# Altium PCB Awtrix Finally.pcbdoc (part 3 of 4)
Units mil, origin at the board's own origin, x right, y up, seen from the top; angles counter-clockwise.
Board outline 8820 x 2812 mil, 2 copper layers (Top Layer, Bottom Layer); 513 components, 259 nets, 1543 pads, 743 vias.
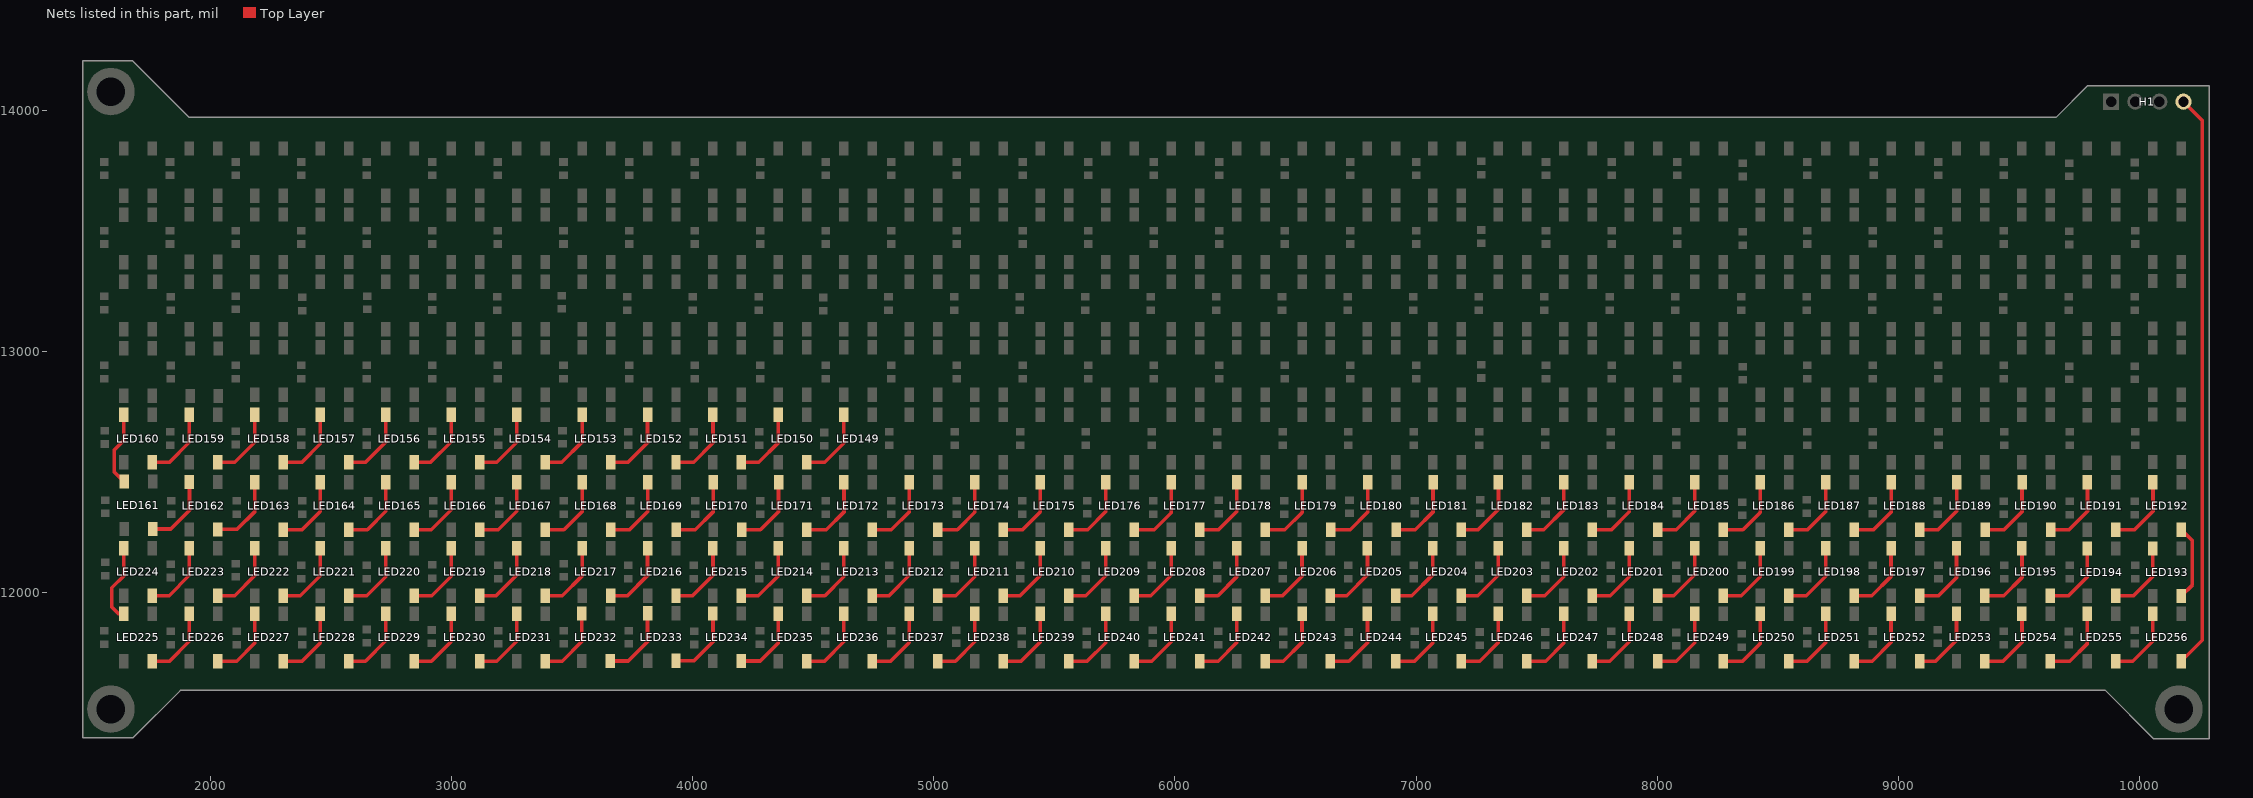
[diagram p3: the nets of this part, all layers, seen from the top]

## Via types
v1: diameter 20, hole 15, Top Layer to Bottom Layer, 743 vias

## Nets (pads, with @x,y where several pads share a name; then routed paths per layer and width w, separated by ;. In a path a pad name is that pad's centre, name@x,y a point inside that pad or via, vN(x,y) a via of type N, cw(c..) or ccw(c..) an arc to the next point about the centre after c; other vN are vias at no path point) (continued)
LED149_2: LED149.2 LED150.4 | length 303.8
  Top Layer w15: LED150.4@4473.57,12541.68 4547.68,12541.68 4626.92,12620.92 LED149.2@4626.92,12738.53
LED150_2: LED150.2 LED151.4 | length 302.3
  Top Layer w15: LED151.4@4202.12,12541.68 4273.68,12541.68 4355.47,12623.47 LED150.2@4355.47,12738.53
LED151_2: LED151.2 LED152.4 | length 303.1
  Top Layer w15: LED152.4@3930.67,12541.68 4003.68,12541.68 4084.02,12622.02 LED151.2@4084.02,12738.53
LED152_2: LED152.2 LED153.4 | length 302.8
  Top Layer w15: LED153.4@3659.22,12541.68 3731.68,12541.68 3812.57,12622.57 LED152.2@3812.57,12738.53
LED153_2: LED153.2 LED154.4 | length 301.1
  Top Layer w15: LED154.4@3387.76,12541.68 3457.27,12541.68 3541.12,12625.52 LED153.2@3541.12,12738.53
LED154_2: LED154.2 LED155.4 | length 301.6
  Top Layer w15: LED155.4@3116.31,12541.68 3186.68,12541.68 3269.66,12624.66 LED154.2@3269.66,12738.53
LED155_2: LED155.2 LED156.4 | length 300.1
  Top Layer w15: LED156.4@2844.86,12541.68 2912.68,12541.68 2998.21,12627.21 LED155.2@2998.21,12738.53
LED156_2: LED156.2 LED157.4 | length 301.3
  Top Layer w15: LED157.4@2573.41,12541.68 2643.24,12541.68 2726.76,12625.21 LED156.2@2726.76,12738.53
LED157_2: LED157.2 LED158.4 | length 305.6
  Top Layer w15: LED158.4@2301.96,12541.68 2379.24,12541.68 2455.31,12617.75 LED157.2@2455.31,12738.53
LED158_2: LED158.2 LED159.4 | length 301.6
  Top Layer w15: LED159.4@2030.51,12541.68 2100.83,12541.68 2183.86,12624.71 LED158.2@2183.86,12738.53
LED159_2: LED159.2 LED160.4 | length 301.7
  Top Layer w15: LED160.4@1759.06,12541.68 1829.68,12541.68 1912.41,12624.41 LED159.2@1912.41,12738.53
LED161_2: LED161.2 LED162.4 | length 303
  Top Layer w15: LED161.2@1759.45,12264.65 1834.65,12264.65 1912.8,12342.8 LED162.4@1912.8,12460.07
LED161_4: LED160.2 LED161.4 | length 311.1
  Top Layer w15: LED160.2@1640.96,12738.53 1640.96,12632.96 1600,12592 1600,12502.85 LED161.4@1641.35,12461.5
LED162_2: LED162.2 LED163.4 | length 305.4
  Top Layer w15: LED162.2@2030.9,12263.22 2110.22,12263.22 2184.25,12337.25 LED163.4@2184.25,12458.64
LED163_2: LED163.2 LED164.4 | length 305.7
  Top Layer w15: LED163.2@2302.35,12261.79 2379.79,12261.79 2455.7,12337.7 LED164.4@2455.7,12458.64
LED164_2: LED164.2 LED165.4 | length 305.5
  Top Layer w15: LED164.2@2573.8,12261.79 2650.79,12261.79 2727.16,12338.16 LED165.4@2727.16,12458.64
LED165_2: LED165.2 LED166.4 | length 301.7
  Top Layer w15: LED165.2@2845.26,12261.79 2915.79,12261.79 2998.61,12344.61 LED166.4@2998.61,12458.64
LED166_2: LED166.2 LED167.4 | length 305.5
  Top Layer w15: LED166.2@3116.71,12261.79 3193.79,12261.79 3270.06,12338.06 LED167.4@3270.06,12458.64
LED167_2: LED167.2 LED168.4 | length 305.8
  Top Layer w15: LED167.2@3388.16,12261.79 3465.79,12261.79 3541.51,12337.51 LED168.4@3541.51,12458.64
LED168_2: LED168.2 LED169.4 | length 306.2
  Top Layer w15: LED168.2@3659.61,12261.79 3737.79,12261.79 3812.96,12336.96 LED169.4@3812.96,12458.64
LED169_2: LED169.2 LED170.4 | length 307.1
  Top Layer w15: LED169.2@3931.06,12261.79 4010.79,12261.79 4084.41,12335.41 LED170.4@4084.41,12458.64
LED171_4: LED170.2 LED171.4 | length 306.2
  Top Layer w15: LED170.2@4202.51,12261.79 4280.79,12261.79 4355.86,12336.86 LED171.4@4355.86,12458.64
LED172_4: LED171.2 LED172.4 | length 307.1
  Top Layer w15: LED171.2@4473.97,12261.79 4553.79,12261.79 4627.32,12335.32 LED172.4@4627.32,12458.64
LED173_2: LED173.2 LED174.4 | length 307.8
  Top Layer w15: LED173.2@5016.87,12261.79 5097.79,12261.79 5170.22,12334.22 LED174.4@5170.22,12458.64
LED173_4: LED172.2 LED173.4 | length 306.3
  Top Layer w15: LED172.2@4745.42,12261.79 4823.79,12261.79 4898.77,12336.77 LED173.4@4898.77,12458.64
LED174_2: LED174.2 LED175.4 | length 306.9
  Top Layer w15: LED174.2@5288.32,12261.79 5367.79,12261.79 5441.67,12335.67 LED175.4@5441.67,12458.64
LED175_2: LED175.2 LED176.4 | length 306.1
  Top Layer w15: LED175.2@5559.77,12261.79 5637.79,12261.79 5713.12,12337.12 LED176.4@5713.12,12458.64
LED177_2: LED177.2 LED178.4 | length 306.1
  Top Layer w15: LED177.2@6102.67,12261.79 6180.79,12261.79 6256.03,12337.03 LED178.4@6256.03,12458.64
LED177_4: LED176.2 LED177.4 | length 308.7
  Top Layer w15: LED176.2@5831.22,12261.79 5913.79,12261.79 5984.57,12332.57 LED177.4@5984.57,12458.64
LED178_2: LED178.2 LED179.4 | length 308.2
  Top Layer w15: LED178.2@6374.13,12261.79 6455.79,12261.79 6527.48,12333.48 LED179.4@6527.48,12458.64
LED179_2: LED179.2 LED180.4 | length 307.9
  Top Layer w15: LED179.2@6645.58,12261.79 6726.79,12261.79 6798.93,12333.93 LED180.4@6798.93,12458.64
LED180_2: LED180.2 LED181.4 | length 307.1
  Top Layer w15: LED180.2@6917.03,12261.79 6996.79,12261.79 7070.38,12335.38 LED181.4@7070.38,12458.64
LED181_2: LED181.2 LED182.4 | length 300.4
  Top Layer w15: LED181.2@7188.48,12261.79 7256.79,12261.79 7341.83,12346.83 LED182.4@7341.83,12458.64
LED182_2: LED182.2 LED183.4 | length 301.3
  Top Layer w15: LED182.2@7459.93,12261.79 7529.79,12261.79 7613.28,12345.28 LED183.4@7613.28,12458.64
LED183_2: LED183.2 LED184.4 | length 306.9
  Top Layer w15: LED183.2@7731.38,12261.79 7810.79,12261.79 7884.73,12335.73 LED184.4@7884.73,12458.64
LED184_2: LED184.2 LED185.4 | length 304.9
  Top Layer w15: LED184.2@8002.83,12261.79 8078.79,12261.79 8156.19,12339.19 LED185.4@8156.19,12458.64
LED185_2: LED185.2 LED186.4 | length 308.1
  Top Layer w15: LED185.2@8274.29,12261.79 8355.79,12261.79 8427.64,12333.64 LED186.4@8427.64,12458.64
LED186_2: LED186.2 LED187.4 | length 306.1
  Top Layer w15: LED186.2@8545.74,12261.79 8623.79,12261.79 8699.09,12337.09 LED187.4@8699.09,12458.64
LED187_2: LED187.2 LED188.4 | length 307.3
  Top Layer w15: LED187.2@8817.19,12261.79 8897.35,12261.79 8970.54,12334.99 LED188.4@8970.54,12458.64
LED188_2: LED188.2 LED189.4 | length 305
  Top Layer w15: LED188.2@9088.64,12261.79 9164.79,12261.79 9241.99,12338.99 LED189.4@9241.99,12458.64
LED189_2: LED189.2 LED190.4 | length 306.5
  Top Layer w15: LED189.2@9360.09,12261.79 9438.79,12261.79 9513.44,12336.44 LED190.4@9513.44,12458.64
LED190_2: LED190.2 LED191.4 | length 305.3
  Top Layer w15: LED190.2@9631.54,12261.79 9708.29,12261.79 9784.9,12338.39 LED191.4@9784.9,12458.64
LED191_2: LED191.2 LED192.4 | length 305.4
  Top Layer w15: LED191.2@9903,12261.79 9979.79,12261.79 10056.35,12338.35 LED192.4@10056.35,12458.64
LED192_2: LED192.2 LED193.4 | length 312.8
  Top Layer w15: LED193.4@10174.05,11986.86 10220,12032.81 10220,12216.24 LED192.2@10174.45,12261.79
LED193_2: LED193.2 LED194.4 | length 302.4
  Top Layer w15: LED194.4@9902.6,11987.58 9975.58,11987.58 10055.95,12067.95 LED193.2@10055.95,12183.71
LED194_2: LED194.2 LED195.4 | length 303.7
  Top Layer w15: LED195.4@9631.15,11988.29 9706.29,11988.29 9784.5,12066.5 LED194.2@9784.5,12184.43
LED195_2: LED195.2 LED196.4 | length 305.8
  Top Layer w15: LED196.4@9359.7,11988.29 9437.29,11988.29 9513.05,12064.05 LED195.2@9513.05,12185.14
LED196_2: LED196.2 LED197.4 | length 306.7
  Top Layer w15: LED197.4@9088.25,11988.29 9167.29,11988.29 9241.6,12062.6 LED196.2@9241.6,12185.14
LED197_2: LED197.2 LED198.4 | length 303.4
  Top Layer w15: LED198.4@8816.79,11988.29 8890.29,11988.29 8970.15,12068.15 LED197.2@8970.15,12185.14
LED198_2: LED198.2 LED199.4 | length 303.1
  Top Layer w15: LED199.4@8545.34,11988.29 8618.29,11988.29 8698.69,12068.69 LED198.2@8698.69,12185.14
LED199_2: LED199.2 LED200.4 | length 304.1
  Top Layer w15: LED200.4@8273.89,11988.29 8348.59,11988.29 8427.24,12066.94 LED199.2@8427.24,12185.14
LED200_2: LED200.2 LED201.4 | length 299.5
  Top Layer w15: LED201.4@8002.44,11988.29 8069.29,11988.29 8155.79,12074.79 LED200.2@8155.79,12185.14
LED201_2: LED201.2 LED202.4 | length 303.9
  Top Layer w15: LED202.4@7730.99,11988.29 7805.29,11988.29 7884.34,12067.34 LED201.2@7884.34,12185.14
LED202_2: LED202.2 LED203.4 | length 304.2
  Top Layer w15: LED203.4@7459.54,11988.29 7534.29,11988.29 7612.89,12066.89 LED202.2@7612.89,12185.14
LED203_2: LED203.2 LED204.4 | length 300.3
  Top Layer w15: LED204.4@7188.09,11988.29 7256.29,11988.29 7341.44,12073.44 LED203.2@7341.44,12185.14
LED204_2: LED204.2 LED205.4 | length 298.8
  Top Layer w15: LED205.4@6916.63,11988.29 6982.29,11988.29 7069.99,12075.99 LED204.2@7069.99,12185.14
LED205_2: LED205.2 LED206.4 | length 299.7
  Top Layer w15: LED206.4@6645.18,11988.29 6712.29,11988.29 6798.53,12074.53 LED205.2@6798.53,12185.14
LED206_2: LED206.2 LED207.4 | length 302.9
  Top Layer w15: LED207.4@6373.73,11988.29 6446.29,11988.29 6527.08,12069.08 LED206.2@6527.08,12185.14
LED207_2: LED207.2 LED208.4 | length 304.9
  Top Layer w15: LED208.4@6102.28,11988.29 6178.29,11988.29 6255.63,12065.63 LED207.2@6255.63,12185.14
LED208_2: LED208.2 LED209.4 | length 300.6
  Top Layer w15: LED209.4@5830.83,11988.29 5899.59,11988.29 5984.18,12072.88 LED208.2@5984.18,12185.14
LED209_2: LED209.2 LED210.4 | length 301.9
  Top Layer w15: LED210.4@5559.38,11988.29 5630.29,11988.29 5712.73,12070.73 LED209.2@5712.73,12185.14
LED210_2: LED210.2 LED211.4 | length 301
  Top Layer w15: LED211.4@5287.93,11988.29 5357.29,11988.29 5441.28,12072.28 LED210.2@5441.28,12185.14
LED211_2: LED211.2 LED212.4 | length 304.2
  Top Layer w15: LED212.4@5016.47,11988.29 5091.29,11988.29 5169.82,12066.83 LED211.2@5169.82,12185.14
LED212_2: LED212.2 LED213.4 | length 300.9
  Top Layer w15: LED213.4@4745.02,11988.29 4814.29,11988.29 4898.37,12072.37 LED212.2@4898.37,12185.14
LED213_2: LED213.2 LED214.4 | length 304.1
  Top Layer w15: LED214.4@4473.57,11988.29 4548.29,11988.29 4626.92,12066.92 LED213.2@4626.92,12185.14
LED214_2: LED214.2 LED215.4 | length 301.5
  Top Layer w15: LED215.4@4202.12,11988.29 4272.29,11988.29 4355.47,12071.47 LED214.2@4355.47,12185.14
LED215_2: LED215.2 LED216.4 | length 300.6
  Top Layer w15: LED216.4@3930.67,11988.29 3999.29,11988.29 4084.02,12073.02 LED215.2@4084.02,12185.14
LED217_2: LED217.2 LED218.4 | length 302.3
  Top Layer w15: LED218.4@3387.76,11988.29 3459.29,11988.29 3541.12,12070.12 LED217.2@3541.12,12185.14
LED217_4: LED216.2 LED217.4 | length 301.4
  Top Layer w15: LED217.4@3659.22,11988.29 3729.29,11988.29 3812.57,12071.57 LED216.2@3812.57,12185.14
LED218_2: LED218.2 LED219.4 | length 300.2
  Top Layer w15: LED219.4@3116.31,11988.29 3184.29,11988.29 3269.66,12073.66 LED218.2@3269.66,12185.14
LED219_2: LED219.2 LED220.4 | length 303.1
  Top Layer w15: LED220.4@2844.86,11988.29 2917.85,11988.29 2998.21,12068.66 LED219.2@2998.21,12185.14
LED220_2: LED220.2 LED221.4 | length 304.2
  Top Layer w15: LED221.4@2573.41,11988.29 2648.29,11988.29 2726.76,12066.76 LED220.2@2726.76,12185.14
LED221_2: LED221.2 LED222.4 | length 301.6
  Top Layer w15: LED222.4@2301.96,11988.29 2372.29,11988.29 2455.31,12071.31 LED221.2@2455.31,12185.14
LED222_2: LED222.2 LED223.4 | length 301.4
  Top Layer w15: LED223.4@2030.51,11988.29 2100.54,11988.29 2183.86,12071.61 LED222.2@2183.86,12185.14
LED223_2: LED223.2 LED224.4 | length 300.9
  Top Layer w15: LED224.4@1759.06,11988.29 1828.29,11988.29 1912.41,12072.41 LED223.2@1912.41,12185.14
LED224_2: LED224.2 LED225.4 | length 326.2
  Top Layer w15: LED225.4@1640.95,11913.42 1618.58,11913.42 1591,11941 1591,12021 1640.96,12070.96 LED224.2@1640.96,12185.14
LED225_2: LED225.2 LED226.4 | length 302
  Top Layer w15: LED225.2@1759.05,11716.57 1830.13,11716.57 1912.4,11798.84 LED226.4@1912.4,11913.42
LED226_2: LED226.2 LED227.4 | length 306.1
  Top Layer w15: LED226.2@2030.5,11716.57 2108.57,11716.57 2183.85,11791.85 LED227.4@2183.85,11913.42
LED227_2: LED227.2 LED228.4 | length 305.8
  Top Layer w15: LED227.2@2301.95,11716.57 2379.57,11716.57 2455.3,11792.3 LED228.4@2455.3,11913.42
LED228_2: LED228.2 LED229.4 | length 300.9
  Top Layer w15: LED228.2@2573.4,11716.57 2642.57,11716.57 2726.75,11800.75 LED229.4@2726.75,11913.42
LED229_2: LED229.2 LED230.4 | length 302.2
  Top Layer w15: LED229.2@2844.85,11716.57 2916.18,11716.57 2998.21,11798.6 LED230.4@2998.21,11913.42
LED230_2: LED230.2 LED231.4 | length 302.1
  Top Layer w15: LED230.2@3116.31,11716.57 3187.57,11716.57 3269.66,11798.66 LED231.4@3269.66,11913.42
LED231_2: LED231.2 LED232.4 | length 302
  Top Layer w15: LED231.2@3387.76,11716.57 3458.57,11716.57 3540,11798 LED232.4@3540,11914
LED232_2: LED232.2 LED233.4 | length 305.2
  Top Layer w15: LED232.2@3658.1,11717.15 3732.15,11717.15 3812.57,11797.57 LED233.4@3812.57,11915
LED233_2: LED233.2 LED234.4 | length 303
  Top Layer w15: LED233.2@3930.67,11718.15 4005.15,11718.15 4084,11797 LED234.4@4084,11914
LED234_2: LED234.2 LED235.4 | length 305.3
  Top Layer w15: LED234.2@4202.1,11717.15 4279.7,11717.15 4355.46,11792.91 LED235.4@4355.46,11913.42
LED235_2: LED235.2 LED236.4 | length 303.1
  Top Layer w15: LED235.2@4473.56,11716.57 4546.57,11716.57 4626.91,11796.91 LED236.4@4626.91,11913.42
LED236_2: LED236.2 LED237.4 | length 304.6
  Top Layer w15: LED236.2@4745.01,11716.57 4820.57,11716.57 4898.37,11794.37 LED237.4@4898.37,11913.42
LED237_2: LED237.2 LED238.4 | length 303.2
  Top Layer w15: LED237.2@5016.47,11716.57 5089.57,11716.57 5169.82,11796.82 LED238.4@5169.82,11913.42
LED238_2: LED238.2 LED239.4 | length 303.5
  Top Layer w15: LED238.2@5287.92,11716.57 5361.57,11716.57 5441.27,11796.27 LED239.4@5441.27,11913.42
LED239_2: LED239.2 LED240.4 | length 305.1
  Top Layer w15: LED239.2@5559.37,11716.57 5635.68,11716.57 5712.72,11793.61 LED240.4@5712.72,11913.42
LED241_2: LED241.2 LED242.4 | length 305.7
  Top Layer w15: LED241.2@6102.27,11716.57 6179.57,11716.57 6255.62,11792.62 LED242.4@6255.62,11913.42
LED241_4: LED240.2 LED241.4 | length 303
  Top Layer w15: LED240.2@5830.82,11716.57 5903.57,11716.57 5984.17,11797.17 LED241.4@5984.17,11913.42
LED242_2: LED242.2 LED243.4 | length 304.9
  Top Layer w15: LED242.2@6373.72,11716.57 6449.81,11716.57 6527.07,11793.83 LED243.4@6527.07,11913.42
LED243_2: LED243.2 LED244.4 | length 305.1
  Top Layer w15: LED243.2@6645.18,11716.57 6721.57,11716.57 6798.53,11793.53 LED244.4@6798.53,11913.42
LED244_2: LED244.2 LED245.4 | length 305.4
  Top Layer w15: LED244.2@6916.63,11716.57 6993.57,11716.57 7069.98,11792.98 LED245.4@7069.98,11913.42
LED245_2: LED245.2 LED246.4 | length 304.8
  Top Layer w15: LED245.2@7188.08,11716.57 7264,11716.57 7341.43,11794 LED246.4@7341.43,11913.42
LED246_2: LED246.2 LED247.4 | length 306.2
  Top Layer w15: LED246.2@7459.53,11716.57 7537.68,11716.57 7612.88,11791.77 LED247.4@7612.88,11913.42
LED247_2: LED247.2 LED248.4 | length 303
  Top Layer w15: LED247.2@7730.98,11716.57 7803.68,11716.57 7884.33,11797.22 LED248.4@7884.33,11913.42
LED248_2: LED248.2 LED249.4 | length 305.6
  Top Layer w15: LED248.2@8002.43,11716.57 8079.57,11716.57 8155.78,11792.78 LED249.4@8155.78,11913.42
LED249_2: LED249.2 LED250.4 | length 307.4
  Top Layer w15: LED249.2@8273.88,11716.57 8354.13,11716.57 8427.24,11789.68 LED250.4@8427.24,11913.42
LED250_2: LED250.2 LED251.4 | length 305
  Top Layer w15: LED250.2@8545.34,11716.57 8621.57,11716.57 8698.69,11793.69 LED251.4@8698.69,11913.42
LED251_2: LED251.2 LED252.4 | length 304.5
  Top Layer w15: LED251.2@8816.79,11716.57 8892.13,11716.57 8970.14,11794.58 LED252.4@8970.14,11913.42
LED252_2: LED252.2 LED253.4 | length 299.2
  Top Layer w15: LED252.2@9088.24,11716.57 9154.57,11716.57 9241.59,11803.59 LED253.4@9241.59,11913.42
LED253_2: LED253.2 LED254.4 | length 304.2
  Top Layer w15: LED253.2@9359.69,11716.57 9434.57,11716.57 9513.04,11795.04 LED254.4@9513.04,11913.42
LED254_2: LED254.2 LED255.4 | length 307.5
  Top Layer w15: LED254.2@9631.14,11716.57 9711.57,11716.57 9784.49,11789.49 LED255.4@9784.49,11913.42
LED255_2: LED255.2 LED256.4 | length 301.7
  Top Layer w15: LED255.2@9902.59,11716.57 9973.13,11716.57 10055.94,11799.39 LED256.4@10055.94,11913.42
OUT: H1.4 LED256.2 | length 2388.8
  Top Layer w15: LED256.2@10174.04,11716.57 10261,11803.53 10261,13959 H1.4@10183,14037